# Altium PCB MB_ANALOG.PcbDoc
Units mm, origin at the board's own origin, x right, y up, seen from the top; angles counter-clockwise.
Board outline 120 x 69 mm, 2 copper layers (Top Layer, Bottom Layer); 61 components, 36 nets, 183 pads, 0 vias.
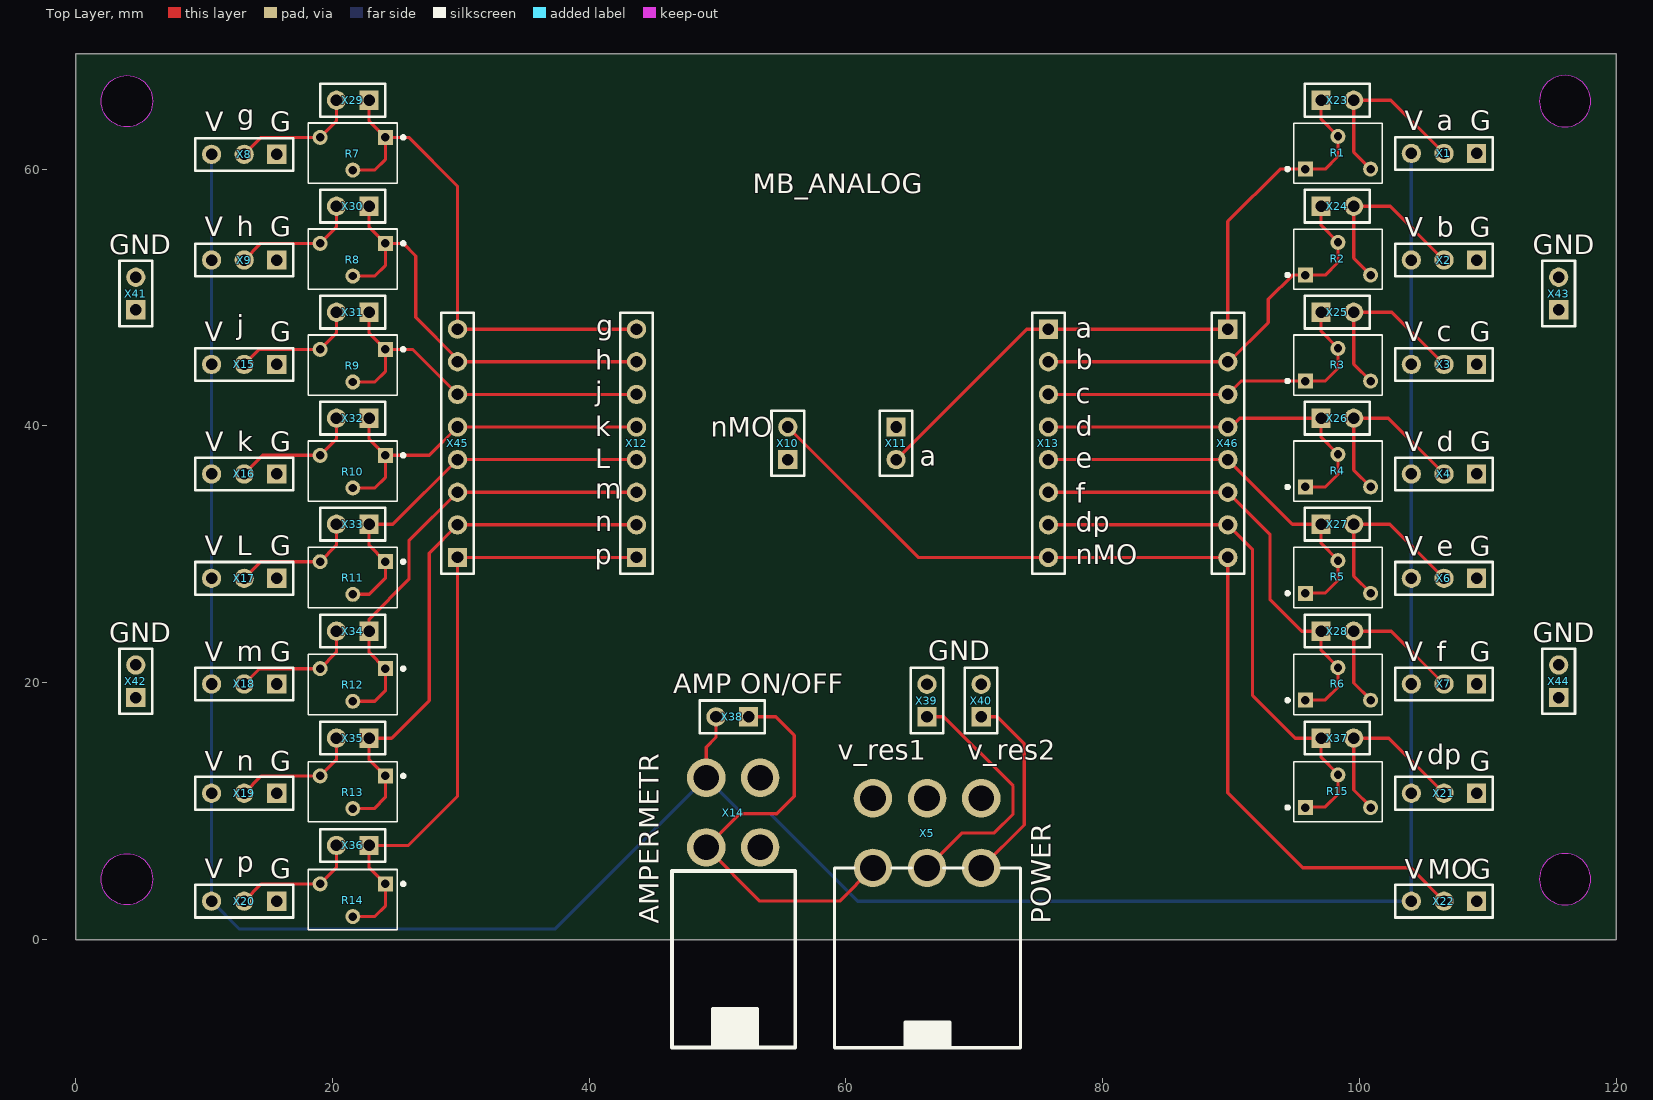
[diagram p0: Top Layer view]
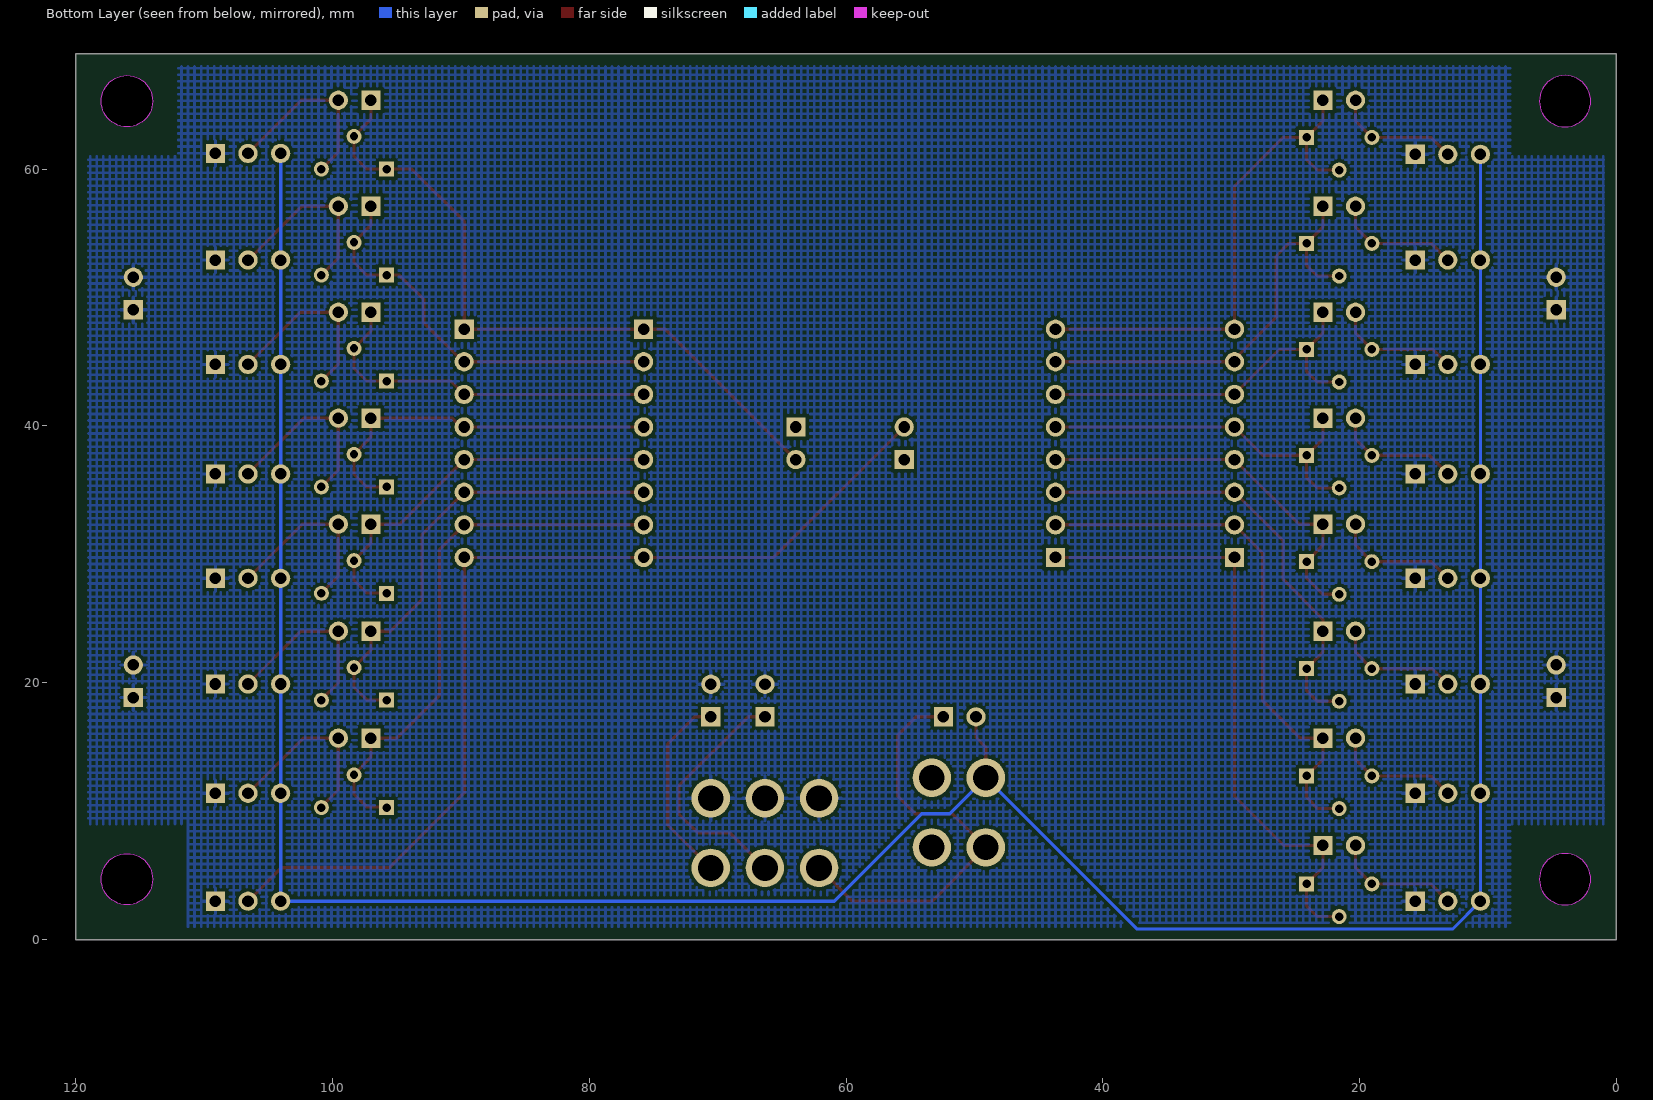
[diagram p1: Bottom Layer view, seen from below]

## Layer stack, top to bottom
Top Solder: solder mask 0.0102, Solder Resist, Dk 3.5
Top Layer: signal copper 0.0356
Dielectric 1: dielectric 0.32, FR-4, Dk 4.8
Bottom Layer: signal copper 0.0356
Bottom Solder: solder mask 0.0102, Solder Resist, Dk 3.5

## Board outline
0,0 120,0 120,69 0,69
cut-out: 114,65.3 ccw(c116,65.3) 116,63.3 ccw(c116,65.3) 118,65.3 ccw(c116,65.3) 116,67.3 ccw(c116,65.3)
cut-out: 114,4.7 ccw(c116,4.7) 116,2.7 ccw(c116,4.7) 118,4.7 ccw(c116,4.7) 116,6.7 ccw(c116,4.7)
cut-out: 4,2.7 cw(c4,4.7) 2,4.7 cw(c4,4.7) 4,6.7 cw(c4,4.7) 6,4.7 cw(c4,4.7)
cut-out: 4,63.3 cw(c4,65.3) 2,65.3 cw(c4,65.3) 4,67.3 cw(c4,65.3) 6,65.3 cw(c4,65.3)

## Design rules (kind name [scope] priority, off if disabled: settings)
Clearance [All] p1: gap=0.254 ignorepadtopadclearanceinfootprint=FALSE except(0: Arc-Hole Track-Hole SMDPad-Hole THPad-Hole Via-Hole Fill-Hole Poly-Hole Region-Hole Text-Hole)
PolygonConnect [All] p1: connectstyle=Relief reliefconductorwidth=0.254 reliefentries=4 polygonreliefangle="90 Angle" airgapwidth=0.254
RoutingVias [All] p1: holewidth=0.711 width=1.27 viastyle="Through Hole" minholewidth=0.711 minwidth=1.27 maxholewidth=0.711 maxwidth=1.27
SolderMaskExpansion [All] p1: expansion=0.102 istentingtop=FALSE
Width [All] p1: maxlimit=0.254 minlimit=0.254 preferedwidth=0.254
30 further rules are at their usual default settings.

## Components (designator, comment, footprint, x,y, rotation, side; value= is the part's Value field where it differs from the comment)
R1 "RES 3266W" "RES 3266W" 95.779,60.011 r0 top
R2 "RES 3266W" "RES 3266W" 95.779,51.756 r0 top
R3 "RES 3266W" "RES 3266W" 95.779,43.501 r0 top
R4 "RES 3266W" "RES 3266W" 95.779,35.25 r0 top
R5 "RES 3266W" "RES 3266W" 95.779,26.97 r0 top
R6 "RES 3266W" "RES 3266W" 95.779,18.639 r0 top
R7 "RES 3266W" "RES 3266W" 24.125,62.475 r180 top
R8 "RES 3266W" "RES 3266W" 24.125,54.22 r180 top
R9 "RES 3266W" "RES 3266W" 24.125,45.965 r180 top
R10 "RES 3266W" "RES 3266W" 24.125,37.71 r180 top
R11 "RES 3266W" "RES 3266W" 24.125,29.43 r180 top
R12 "RES 3266W" "RES 3266W" 24.125,21.099 r180 top
R13 "RES 3266W" "RES 3266W" 24.125,12.742 r180 top
R14 "RES 3266W" "RES 3266W" 24.125,4.335 r180 top
R15 "RES 3266W" "RES 3266W" 95.779,10.282 r0 top
X1 "Header 3" HDR1X3 109.114,61.231 r180 top
X2 "Header 3" HDR1X3 109.114,52.925 r180 top
X3 "Header 3" HDR1X3 109.114,44.797 r180 top
X4 "Header 3" HDR1X3 109.114,36.262 r180 top
X5 "POWER" POWER 62.097,5.579 r180 top
X6 "Header 3" HDR1X3 109.114,28.134 r180 top
X7 "Header 3" HDR1X3 109.114,19.905 r180 top
X8 "Header 3" HDR1X3 15.667,61.154 r180 top
X9 "Header 3" HDR1X3 15.667,52.925 r180 top
X10 "Header 2" HDR1X2 55.469,37.38 r90 top
X11 "Header 2" HDR1X2 63.902,39.92 r270 top
X12 "Header 8" HDR1X8 43.683,29.76 r90 top
X13 "Header 8" HDR1X8 75.764,47.54 r270 top
X14 "AMP_VOLTMETR" AMP_VOLTMETR 49.11,12.602 r0 top
X15 "Header 3" HDR1X3 15.667,44.797 r180 top
X16 "Header 3" HDR1X3 15.667,36.262 r180 top
X17 "Header 3" HDR1X3 15.667,28.134 r180 top
X18 "Header 3" HDR1X3 15.667,19.905 r180 top
X19 "Header 3" HDR1X3 15.667,11.396 r180 top
X20 "Header 3" HDR1X3 15.667,2.988 r180 top
X21 "Header 3" HDR1X3 109.114,11.396 r180 top
X22 "Header 3" HDR1X3 109.114,2.988 r180 top
X23 "Header 2" HDR1X2 96.998,65.371 r0 top
X24 "Header 2" HDR1X2 96.998,57.116 r0 top
X25 "Header 2" HDR1X2 96.998,48.861 r0 top
X26 "Header 2" HDR1X2 96.998,40.606 r0 top
X27 "Header 2" HDR1X2 96.998,32.351 r0 top
X28 "Header 2" HDR1X2 96.998,24.02 r0 top
X29 "Header 2" HDR1X2 22.855,65.371 r180 top
X30 "Header 2" HDR1X2 22.855,57.116 r180 top
X31 "Header 2" HDR1X2 22.855,48.861 r180 top
X32 "Header 2" HDR1X2 22.855,40.606 r180 top
X33 "Header 2" HDR1X2 22.855,32.351 r180 top
X34 "Header 2" HDR1X2 22.855,24.02 r180 top
X35 "Header 2" HDR1X2 22.855,15.688 r180 top
X36 "Header 2" HDR1X2 22.855,7.332 r180 top
X37 "Header 2" HDR1X2 96.998,15.688 r0 top
X38 "Header 2" HDR1X2 52.414,17.348 r180 top
X39 "Header 2" HDR1X2 66.308,17.348 r90 top
X40 "Header 2" HDR1X2 70.524,17.348 r90 top
X41 "Header 2" HDR1X2 4.687,49.047 r90 top
X42 "Header 2" HDR1X2 4.687,18.847 r90 top
X43 "Header 2" HDR1X2 115.507,49.047 r90 top
X44 "Header 2" HDR1X2 115.507,18.847 r90 top
X45 "Header 8" HDR1X8 29.742,29.76 r90 top
X46 "Header 8" HDR1X8 89.742,47.54 r270 top

## Footprints (in the part's own frame and the unit in brackets; to place one, negate y for a bottom-side part, rotate by r counter-clockwise, add the part's x,y. Pads: shape width x height; smd on the part's side, far side on the other; paste and mask are expansions set on the pad)
AMP_VOLTMETR [mm]
  round 3 hole 2: 1(0,0) 2(0,-5.423) 3(4.2,-5.423) 4(4.2,0)
  silkscreen extent -2.66,-21 6.94,-7.25
HDR1X2 [mm] "Connector; Header; 2 Position"
  rect 1.5x1.5 hole 0.9: 1(0,0)
  round 1.5 hole 0.9: 2(2.54,0)
  silkscreen extent -1.27,-1.27 3.81,1.27
HDR1X3 [mm] "Connector; Header; 3 Position"
  rect 1.5x1.5 hole 0.9: 1(0,0)
  round 1.5 hole 0.9: 2(2.54,0) 3(5.08,0)
  silkscreen extent -1.27,-1.27 6.35,1.27
HDR1X8 [mm] "Connector; Header; 8 Position"
  rect 1.5x1.5 hole 0.9: 1(0,0)
  round 1.5 hole 0.9: 2(2.54,0) 3(5.08,0) 4(7.62,0) 5(10.16,0) 6(12.7,0) 7(15.24,0) 8(17.78,0)
  silkscreen extent -1.27,-1.27 19.05,1.27
POWER [mm]
  round 3 hole 2: 1(0,0) 2(-4.217,0) 3(-8.435,0) 4(0,-5.422) 5(-4.217,-5.422) 6(-8.435,-5.422)
  silkscreen extent -11.5,0 3,14
"RES 3266W" [mm]
  rect 1.168x1.168 hole 0.66: 1(0,0)
  round 1.168 hole 0.66: 2(2.54,2.54) 3(5.08,0)
  silkscreen extent -1.48,-1.12 5.99,3.58

## Part data
X1 X2 X3 X4 X6 X7 X8 X9 X15 X16 X17 X18 X19 X20 X21 X22: "Header, 3-Pin", LatestRevisionDate=17-Jul-2002, LatestRevisionNote="Re-released for DXP Platform.", Publisher="Altium Limited"
X10 X11 X23 X24 X25 X26 X27 X28 X29 X30 X31 X32 X33 X34 X35 X36 X37 X38 X39 X40 X41 X42 X43 X44: "Header, 2-Pin", LatestRevisionDate=17-Jul-2002, LatestRevisionNote="Re-released for DXP Platform.", Publisher="Altium Limited"
X12 X13 X45 X46: "Header, 8-Pin", LatestRevisionDate=17-Jul-2002, LatestRevisionNote="Re-released for DXP Platform.", Publisher="Altium Limited"

## Nets (pads, with @x,y where several pads share a name; then routed paths per layer and width w, separated by ;. In a path a pad name is that pad's centre, name@x,y a point inside that pad or via, vN(x,y) a via of type N, cw(c..) or ccw(c..) an arc to the next point about the centre after c; other vN are vias at no path point)
a: R1.3 X1.2 X23.2 | length 14.7
  Top Layer w0.254: R1.3 99.538,61.332 X23.2 102.434,65.371 X1.2
a_0: R1.1 R1.2 X11.2 X13.1 X23.1 X46.1 | length 54
  Top Layer w0.254: X11.2 74.062,47.54 X13.1 X46.1 89.742,55.935 93.819,60.011 R1.1 97.327,60.011 98.319,61.003 R1.2 96.998,63.872 X23.1
b: R2.3 X2.2 X24.2 | length 14.7
  Top Layer w0.254: R2.3 99.538,53.077 X24.2 102.383,57.116 X2.2
b_0: R2.1 R2.2 X13.2 X24.1 X46.2 | length 31.7
  Top Layer w0.254: X13.2 X46.2 89.831,45 92.888,48.057 92.888,49.86 94.784,51.756 R2.1 97.327,51.756 98.319,52.748 R2.2 96.998,55.617 X24.1
c: R3.3 X3.2 X25.2 | length 14.6
  Top Layer w0.254: R3.3 99.538,44.822 X25.2 102.51,48.861 X3.2
c_0: R3.1 R3.2 X13.3 X25.1 X46.3 | length 28.3
  Top Layer w0.254: X13.3 X46.3 90.784,43.501 R3.1 97.327,43.501 98.319,44.493 R3.2 96.998,47.362 X25.1
d: R4.3 X4.2 X26.2 | length 14.7
  Top Layer w0.254: R4.3@100.859,35.246 99.538,36.567 X26.2 102.23,40.606 X4.2
d_0: R4.1 R4.2 X13.4 X26.1 X46.4 | length 29.4
  Top Layer w0.254: X13.4 X46.4 89.97,39.92 90.656,40.606 X26.1 96.998,39.107 98.319,37.786 98.319,36.238 97.327,35.246 R4.1@95.779,35.246
dp: R15.3 X21.2 X37.2 | length 14.7
  Top Layer w0.254: R15.3@100.859,10.329 99.538,11.65 X37.2 102.281,15.688 X21.2
dp_0: R15.1 R15.2 X13.7 X37.1 X46.7 | length 42.6
  Top Layer w0.254: X13.7 X46.7 91.669,30.374 91.669,18.999 94.979,15.688 X37.1 96.998,14.19 98.319,12.869 R15.2 98.319,11.321 97.327,10.329 R15.1@95.779,10.329
e: R5.3 X6.2 X27.2 | length 14.7
  Top Layer w0.254: R5.3@100.859,26.991 99.538,28.312 X27.2 102.357,32.351 X6.2
e_0: R5.1 R5.2 X13.5 X27.1 X46.5 | length 31.2
  Top Layer w0.254: X13.5 X46.5 94.772,32.351 X27.1 96.998,30.852 98.319,29.531 R5.2 98.319,27.983 97.327,26.991 R5.1@95.779,26.991
f: R6.3 X7.2 X28.2 | length 14.6
  Top Layer w0.254: R6.3@100.859,18.66 99.538,19.981 X28.2 102.459,24.02 X7.2
f_0: R6.1 R6.2 X13.6 X28.1 X46.6 | length 36.6
  Top Layer w0.254: X13.6 X46.6 93.015,31.568 93.015,26.492 95.487,24.02 X28.1 96.998,22.521 98.319,21.2 R6.2 98.319,19.652 97.327,18.66 R6.1@95.779,18.66
g: R7.3 X8.2 X29.2 | length 9.9
  Top Layer w0.254: X8.2 14.448,62.475 R7.3 20.315,63.745 X29.2
g_0: R7.1 R7.2 X12.8 X29.1 X45.8 | length 40.3
  Top Layer w0.254: R7.2 23.312,59.935 24.125,60.749 R7.1 ; X29.1 22.855,63.745 R7.1 ; X12.8 X45.8 29.742,58.675 25.942,62.475 R7.1
GND: X1.1 X2.1 X3.1 X4.1 X5.4 X5.5 X5.6 X6.1 X7.1 X8.1 X9.1 X15.1 X16.1 X17.1 X18.1 X19.1 X20.1 X21.1 X22.1 X39.2 X40.2 X41.1 X41.2 X42.1 X42.2 X43.1 X43.2 X44.1 X44.2
h: R8.3 X9.2 X30.2 | length 9.9
  Top Layer w0.254: X9.2 14.423,54.22 R8.3 20.315,55.49 X30.2
h_0: R8.1 R8.2 X12.7 X30.1 X45.7 | length 34.3
  Top Layer w0.254: R8.2 23.312,51.68 24.125,52.494 R8.1 ; X30.1 22.855,55.49 R8.1 ; X12.7 X45.7 29.742,45.213 26.492,48.463 26.492,53.238 25.51,54.22 R8.1
j: R9.3 X15.2 X31.2 | length 9.8
  Top Layer w0.254: X15.2 14.296,45.965 R9.3 20.315,47.235 X31.2
j_0: R9.1 R9.2 X12.6 X31.1 X45.6 | length 29
  Top Layer w0.254: R9.2 23.312,43.425 24.125,44.239 R9.1 ; X31.1 22.855,47.235 R9.1 ; X12.6 X45.6 26.237,45.965 R9.1
k: R10.3 X16.2 X32.2 | length 9.9
  Top Layer w0.254: X16.2 14.575,37.71 R10.3 20.315,38.98 X32.2
k_0: R10.1 R10.2 X12.5 X32.1 X45.5 | length 28.5
  Top Layer w0.254: R10.2 23.312,35.17 24.125,35.984 R10.1 ; X32.1 22.855,38.98 R10.1 ; X12.5 X45.5 27.533,37.71 R10.1
l: R11.3 X17.2 X33.2 | length 9.9
  Top Layer w0.254: X17.2 14.423,29.43 R11.3 20.315,30.7 X33.2
l_0: R11.1 R11.2 X12.4 X33.1 X45.4 | length 30.7
  Top Layer w0.254: R11.2 22.88,26.89 24.125,28.135 R11.1 22.855,30.7 X33.1 24.713,32.351 X45.4 X12.4
m: R12.3 X18.2 X34.2 | length 9.9
  Top Layer w0.254: X18.2 14.321,21.099 R12.3 20.315,22.369 X34.2
M\O\: X10.2 X13.8 X22.2 X46.8 | length 77.1
  Top Layer w0.254: X10.2 65.629,29.76 X13.8 X46.8 89.742,11.426 95.58,5.588 103.974,5.588 X22.2
m_0: R12.1 R12.2 X12.3 X34.1 X45.3 | length 35.7
  Top Layer w0.254: R12.2 23.312,18.559 24.125,19.372 R12.1 22.855,22.369 X34.1 22.855,24.944 25.959,28.048 25.959,31.056 X45.3 X12.3
n: R13.3 X19.2 X35.2 | length 9.9
  Top Layer w0.254: X19.2 14.473,12.742 R13.3 20.315,14.012 X35.2
n_0: R13.1 R13.2 X12.2 X35.1 X45.2 | length 42.5
  Top Layer w0.254: R13.2 23.261,10.202 24.125,11.067 R13.1 22.855,14.012 X35.1 24.608,15.688 27.534,18.614 27.534,30.091 X45.2 X12.2
p: R14.3 X20.2 X36.2 | length 10
  Top Layer w0.254: X20.2 14.473,4.335 R14.3 20.315,5.605 X36.2
p_0: R14.1 R14.2 X12.1 X36.1 X45.1 | length 49.1
  Top Layer w0.254: R14.2 23.312,1.795 24.125,2.608 R14.1 22.855,5.605 X36.1 25.925,7.332 29.742,11.15 X45.1 X12.1
V: X5.1 X14.2 X38.1 | length 33.2
  Top Layer w0.254: X38.1 54.522,17.348 55.97,15.9 55.97,11.151 54.624,9.804 51.735,9.804 X14.2 53.292,2.997 59.515,2.997 X5.1
V_0: X1.3 X2.3 X3.3 X4.3 X6.3 X7.3 X8.3 X9.3 X14.1 X15.3 X16.3 X17.3 X18.3 X19.3 X20.3 X21.3 X22.3 X38.2 | length 224.7
  Top Layer w0.254: X14.1 49.11,14.984 49.874,15.748 X38.2
  Bottom Layer w0.254: X8.3 X9.3 X15.3 X16.3 X17.3 X18.3 X19.3 X20.3 12.763,0.813 37.32,0.813 X14.1 51.908,9.804 54.105,9.804 60.921,2.988 X22.3 X21.3 X7.3 X6.3 X4.3 X3.3 X2.3 X1.3
V_RES_1: X5.2 X39.1 | length 19.6
  Top Layer w0.254: X39.1 67.628,17.348 73.013,11.963 73.013,9.779 71.54,8.306 69.041,8.306 X5.2
V_RES_2: X5.3 X40.1 | length 15.3
  Top Layer w0.254: X40.1 71.769,17.348 73.877,15.24 73.877,8.924 X5.3
pads on no net: X10.1 X11.1 X14.3 X14.4

## Polygon pours and split planes (outlines as drawn)
GND on Bottom Layer "GND_L02_P000" (hatched 90Degree grid 0.508 track 0.203, remove dead copper, pour order 0): 1,68 119,68 119,1 1,1

## Other copper
Bottom Layer:
  pour cut-out: 0,9 8.25,9 8.25,0 0,0
  pour cut-out: 111.25,9 120,9 120,0 111.25,0
  pour cut-out: 112,69 120,69 120,61 112,61
  pour cut-out: 0,69 8.25,69 8.25,61 0,61

## Silkscreen, mask and mechanical layers (free items; w line width, h text height)
Top Overlay:
  text "g" at 12.576,63.449 h1.52
  text "V" at 103.534,63.017 h1.52
  text "a" at 106.023,63.017 h1.52
  text "G" at 108.614,63.017 h1.52
  text "V" at 10.087,62.941 h1.52
  text "G" at 15.167,62.941 h1.52
  text "MB_ANALOG" at 52.719,58.115 h1.52
  text "V" at 10.062,54.762 h1.52
  text "h" at 12.551,54.762 h1.52
  text "G" at 15.142,54.762 h1.52
  text "V" at 103.508,54.737 h1.52
  text "b" at 105.997,54.737 h1.52
  text "G" at 108.588,54.737 h1.52
  text "GND" at 2.63,53.391 h1.52
  text "GND" at 113.501,53.391 h1.52
  text "j" at 12.551,47.092 h1.52
  text "g" at 40.542,47.066 h1.52
  text "a" at 77.905,46.863 h1.52
  text "V" at 10.062,46.584 h1.52
  text "G" at 15.142,46.584 h1.52
  text "V" at 103.508,46.584 h1.52
  text "c" at 105.997,46.584 h1.52
  text "G" at 108.588,46.584 h1.52
  text "b" at 77.905,44.399 h1.52
  text "h" at 40.465,44.374 h1.52
  text "j" at 40.465,41.91 h1.52
  text "c" at 77.905,41.758 h1.52
  text "d" at 77.905,39.243 h1.52
  text "k" at 40.465,39.192 h1.52
  text "nMO" at 49.475,39.158 h1.52
  text "V" at 10.087,38.049 h1.52
  text "k" at 12.576,38.049 h1.52
  text "G" at 15.167,38.049 h1.52
  text "V" at 103.534,38.024 h1.52
  text "d" at 106.023,38.024 h1.52
  text "G" at 108.614,38.024 h1.52
  text "a" at 65.731,36.897 h1.52
  text "e" at 77.905,36.728 h1.52
  text "L" at 40.465,36.703 h1.52
  text "m" at 40.465,34.341 h1.52
  text "f" at 77.905,34.036 h1.52
  text "n" at 40.465,31.801 h1.52
  text "dp" at 77.905,31.775 h1.52
  text "V" at 10.062,29.921 h1.52
  text "L" at 12.551,29.921 h1.52
  text "G" at 15.142,29.921 h1.52
  text "V" at 103.508,29.896 h1.52
  text "e" at 105.997,29.896 h1.52
  text "G" at 108.588,29.896 h1.52
  text "p" at 40.415,29.235 h1.52
  text "nMO" at 77.905,29.235 h1.52
  text "GND" at 2.63,23.165 h1.52
  text "GND" at 113.501,23.165 h1.52
  text "GND" at 66.409,21.742 h1.52
  text "V" at 10.062,21.666 h1.52
  text "m" at 12.551,21.666 h1.52
  text "G" at 15.142,21.666 h1.52
  text "V" at 103.508,21.666 h1.52
  text "f" at 105.997,21.666 h1.52
  text "G" at 108.588,21.666 h1.52
  text "AMP ON/OFF" at 46.546,19.202 h1.52
  text "v_res1" at 59.373,13.995 h1.52
  text "v_res2" at 69.432,13.995 h1.52
  text "dp" at 105.286,13.665 h1.52
  text "V" at 10.062,13.157 h1.52
  text "n" at 12.551,13.157 h1.52
  text "G" at 15.142,13.157 h1.52
  text "V" at 103.508,13.157 h1.52
  text "G" at 108.588,13.157 h1.52
  text "p" at 12.551,5.283 h1.52
  text "V" at 10.062,4.775 h1.52
  text "G" at 15.142,4.775 h1.52
  text "V" at 103.508,4.75 h1.52
  text "MO" at 105.312,4.75 h1.52
  text "G" at 108.639,4.75 h1.52
  text "AMPERMETR" at 45.403,1.245 h1.52 r90
  text "POWER" at 75.96,1.245 h1.52 r90
Mechanical 1:
  circle w0.254: c4,4.7 r2
  circle w0.254: c4,65.3 r2
  circle w0.254: c116,4.7 r2
  circle w0.254: c116,65.3 r2
  lines w0.254: 0,0 0,69 120,69 120,0 0,0